# Altium PCB PCB1.PcbDoc
Units mm, origin at the board's own origin, x right, y up, seen from the top; angles counter-clockwise.
Board outline 127 x 101.6 mm, 2 copper layers (Top Layer, Bottom Layer); 37 components, 22 nets, 102 pads, 3 vias.
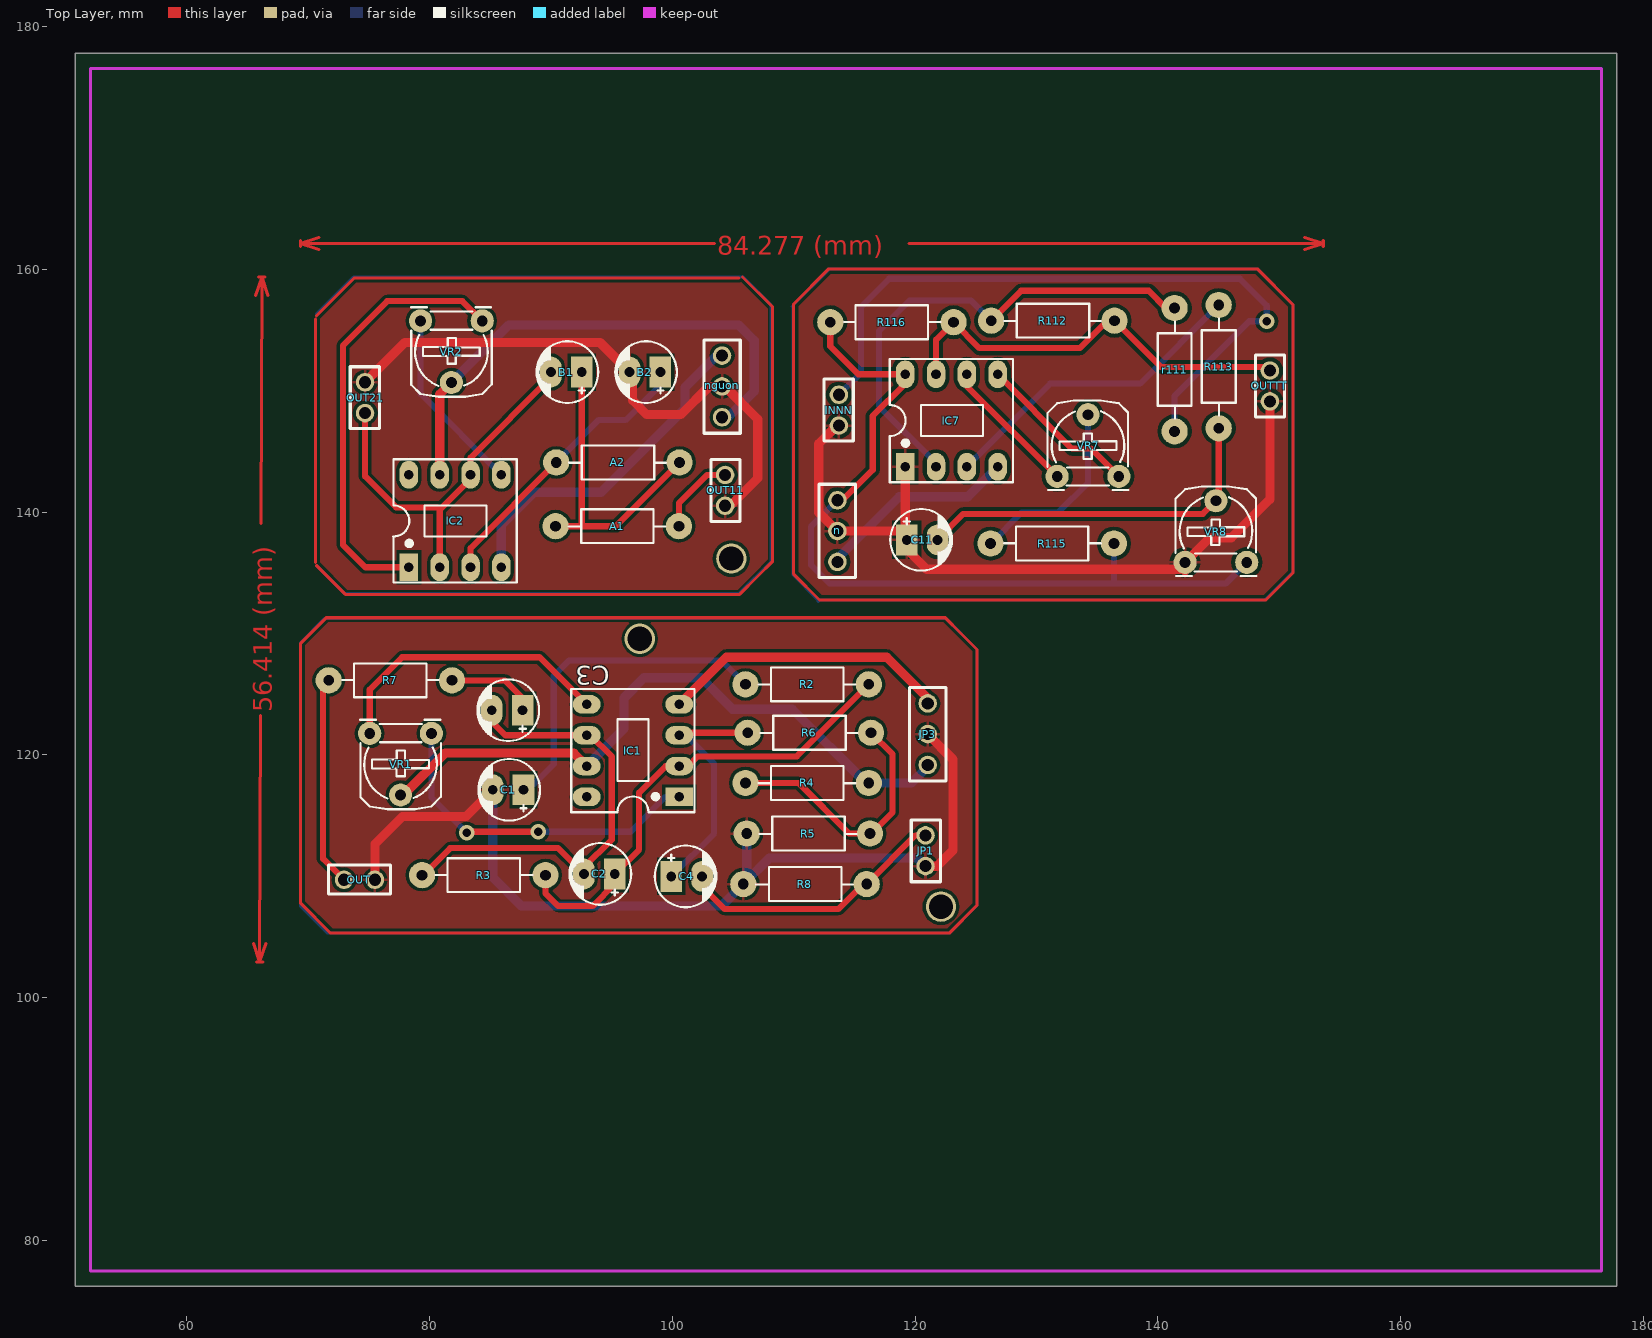
[diagram p0: Top Layer view]
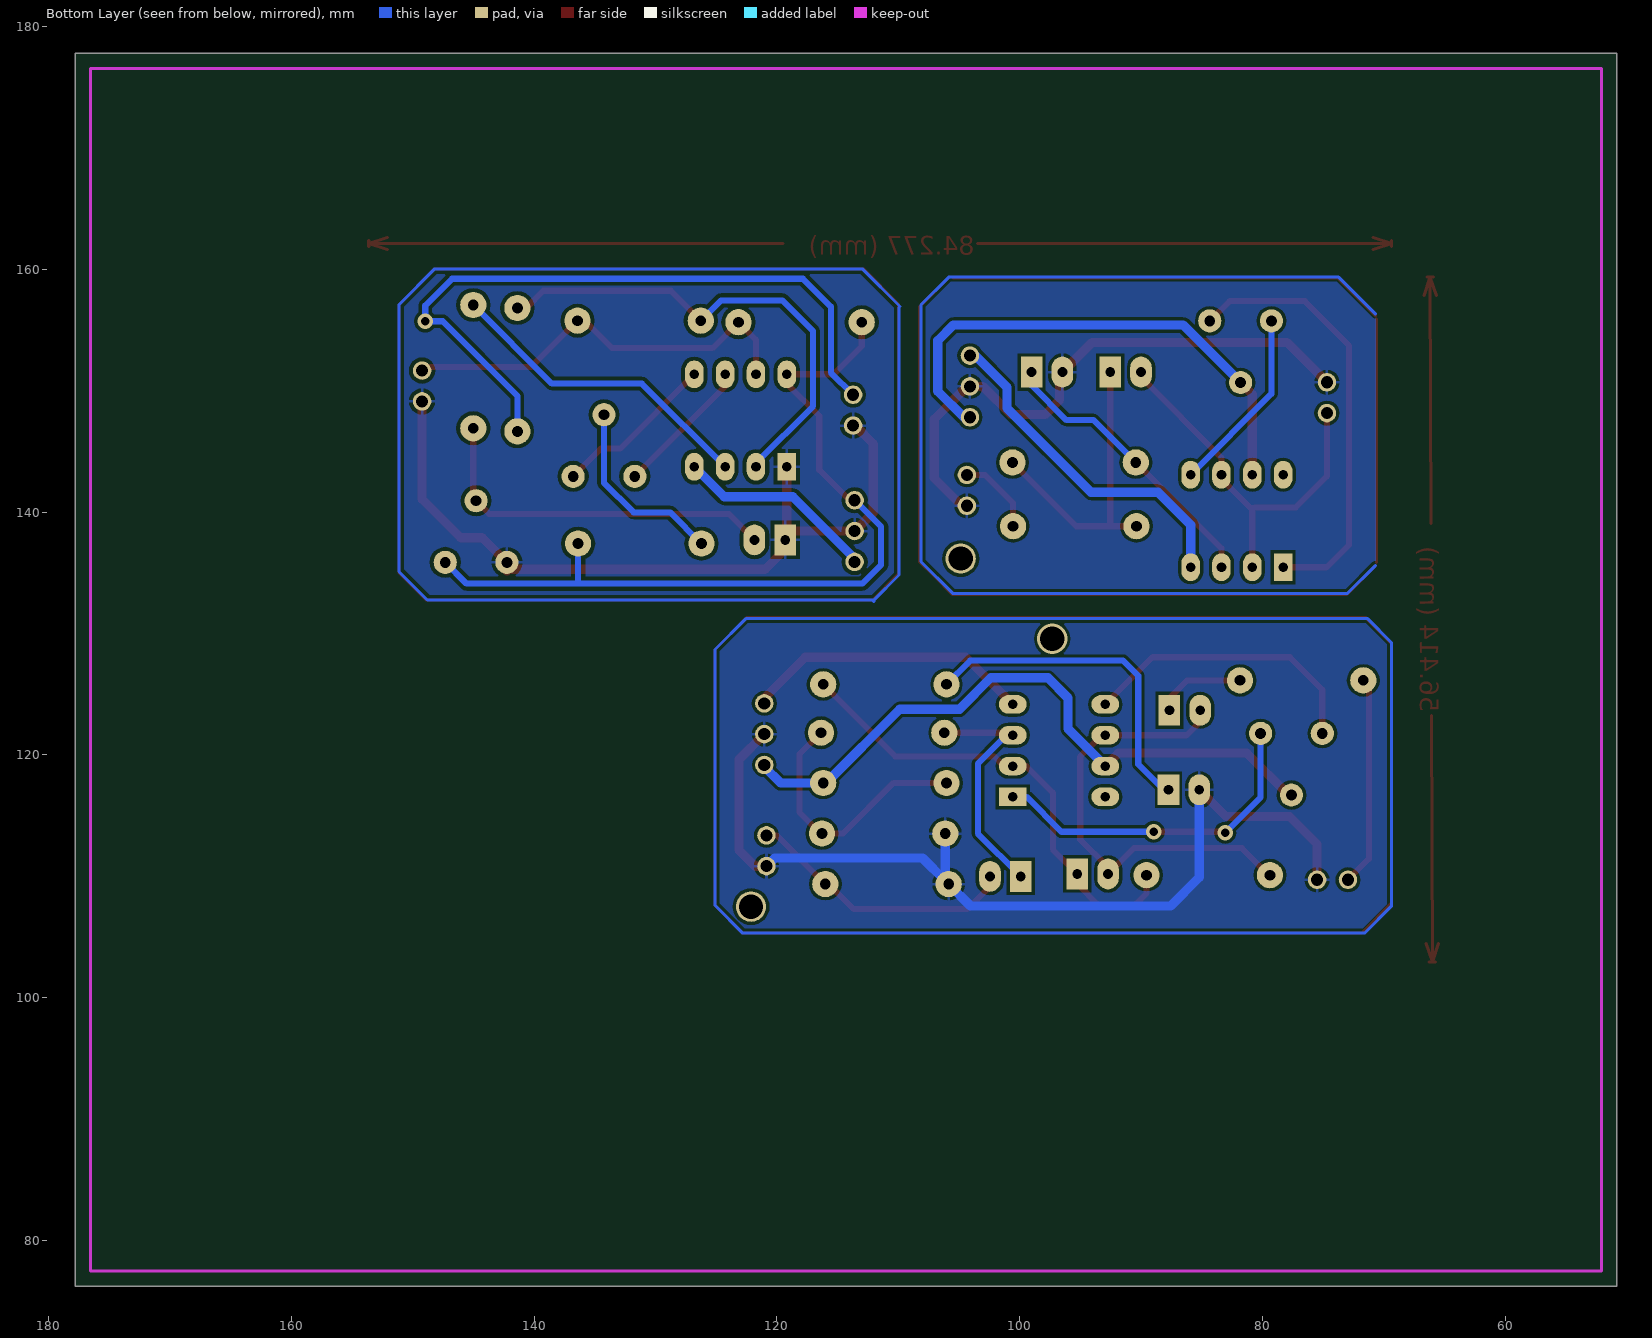
[diagram p1: Bottom Layer view, seen from below]
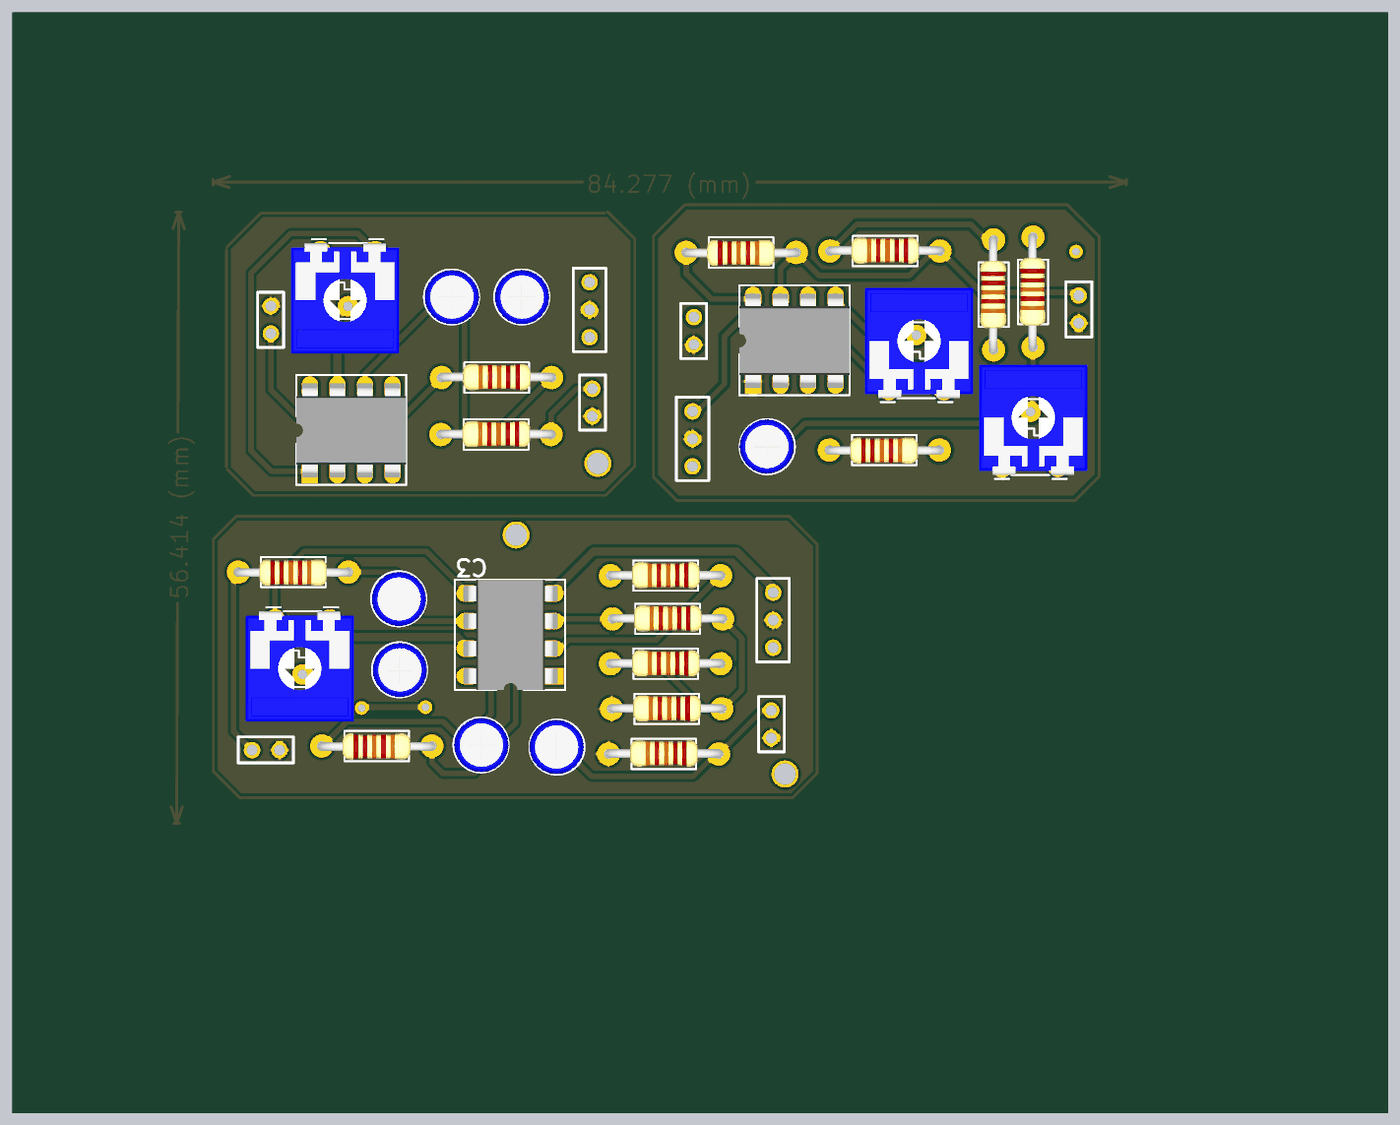
[diagram p2: 3D render of the assembled board from above, using the file's embedded part models]

## Layer stack, top to bottom
Top Layer: signal copper 0.0356
Dielectric: core 0.32, FR-4, Dk 4.8
Bottom Layer: signal copper 0.0356

## Board outline
50.8,76.2 177.8,76.2 177.8,177.8 50.8,177.8

## Design rules (kind name [scope] priority, off if disabled: settings)
Clearance [All] p1: gap=0.254
PolygonConnect [All] p1: connectstyle=Relief reliefconductorwidth=0.254 reliefentries=4 polygonreliefangle="90 Angle" airgapwidth=0.254
RoutingVias [All] p1: holewidth=0.635 width=1.016 viastyle="Through Hole" minholewidth=0.711 minwidth=1.27 maxholewidth=0.711 maxwidth=1.27
SilkToSolderMaskClearance SilkscreenOverComponentPads [IsPad] p1: minsilkscreentomaskgap=0.254 clearancetoexposedcopper=TRUE
SolderMaskExpansion [All] p1: expansion=0.076
Width Width_6 [InNet('VCC1')] p1: maxlimit=0.762 minlimit=0.762 preferedwidth=0.762
Width Width_5 [InNet('VCC')] p2: maxlimit=0.762 minlimit=0.762 preferedwidth=0.762
Width Width_4 [InNet('GND1')] p3: maxlimit=0.762 minlimit=0.762 preferedwidth=0.762
Width Width_3 [InNet('GND')] p4: maxlimit=0.762 minlimit=0.762 preferedwidth=0.762
Width Width_2 [InNet('-VCC1')] p5: maxlimit=0.762 minlimit=0.762 preferedwidth=0.762
Width Width_1 [InNet('-VCC')] p6: maxlimit=0.762 minlimit=0.762 preferedwidth=0.762
Width [All] p7: maxlimit=0.508 minlimit=0.508 preferedwidth=0.508
27 further rules are at their usual default settings.

## Classes and differential pairs
component class MACH: A1 A2 B1 B2 C1 C2 C3 C4 IC1 IC2 JP1 JP3 nguon OUT OUT11 OUT21 R2 R3 R4 R5 R6 R7 R8 VR1 VR2

## Components (designator, comment, footprint, x,y, rotation, side; value= is the part's Value field where it differs from the comment)
A1 "1k" R1/2W 90.373,138.836 r0 top
A2 "1k" R1/2W 90.424,144.094 r0 top
B1 "10uF" CP1/2 92.532,151.536 r180 top
B2 "10uF" CP1/2 99.009,151.536 r180 top
C1 "10uF" CP1/2 87.732,117.119 r180 top
C2 "103" CP1/2 95.25,110.185 r180 top
C3 "100uF/35V" CP1/2 87.655,123.673 r180 top
C4 "100uF/35V" CP1/2 99.898,109.982 r0 top
C11 "103" CP1/2 119.304,137.71 r0 top
IC1 "LF356" DIP8/W0.3 100.559,116.535 r90 top
IC2 "LM741" DIP8/W0.3 78.283,135.458 r0 top
IC7 "LM311" DIP8/W0.3 119.177,143.729 r0 top
INNN "JP2" CON2 113.716,148.428 r90 top
JP1 "JP2" CON2 120.853,112.065 r270 top
JP3 "JP3" CON3 121.031,121.742 r270 top
n "JP3" CON3 113.589,138.395 r90 top (schematic designator nguon)
nguon "JP3" CON3 104.089,150.393 r270 top
OUT "JP2" CON2 74.244,109.703 r0 top
OUT11 "JP2" CON2 104.343,141.757 r270 top
OUT21 "JP2" CON2 74.676,149.454 r90 top
OUTTT "JP2" CON2 149.225,150.359 r270 top
R2 "1K" R1/2W 106.02,125.806 r0 top
R3 "1M" R1/2W 89.535,110.084 r180 top
R4 "1k" R1/2W 106.02,117.678 r0 top
R5 "1k" R1/2W 106.121,113.513 r0 top
R6 "1k" R1/2W 106.197,121.818 r0 top
R7 "1K" R1/2W 81.839,126.136 r180 top
R8 "1K" R1/2W 105.842,109.347 r0 top
r111 "1k" R1/2W 141.376,146.65 r90 top
R112 "1k" R1/2W 126.263,155.769 r0 top
R113 "1k" R1/2W 145.009,146.904 r90 top
R115 "1k" R1/2W 136.373,137.405 r180 top
R116 "1k" R1/2W 123.165,155.642 r180 top
VR1 "5K" VR 80.137,121.768 r180 top
VR2 "5K" VR 84.328,155.753 r180 top
VR7 "5K" VR 131.699,142.942 r0 top
VR8 "5K" VR 142.24,135.855 r0 top

## Footprints (in the part's own frame and the unit in brackets; to place one, negate y for a bottom-side part, rotate by r counter-clockwise, add the part's x,y. Pads: shape width x height; smd on the part's side, far side on the other; paste and mask are expansions set on the pad)
CON2 [mm] "2-Pin Connector; pitch 2.54mm"
  round 1.524 hole 1: 1(-1.3,0) 2(1.24,0)
  silkscreen extent -2.58,-1.18 2.52,1.22
CON3 [mm] "3-Pin Connector; pitch 2.54mm"
  round 1.524 hole 1: 1(-2.5,0) 2(0.04,0) 3(2.58,0)
  silkscreen extent -3.8,-1.5 3.9,1.5
CP1/2 [mil] "Tu hoa  Dia = 5mm < 22uF/16>50V"
  rect 70x100 hole 32: 1(0,0)
  oval 70x100 hole 32: 2(100,0)
  silkscreen extent -53,-100 147,100, body extent -54,-99 144,100, height 296
DIP8/W0.3 [mil] "8 PIN, W 300mil, Pin to pin 100mil"
  rect 60x90 hole 31: 1(0,0)
  oval 60x90 hole 31: 2(100,0) 3(200,0) 4(300,0) 5(300,300) 6(200,300) 7(100,300) 8(0,300)
  silkscreen extent -50,-50 350,350, body extent -50,-40 350,336, height 201
R1/2W [mil] "R 1/2W, 2 pin, 300mil"
  round 85 hole 35: 1(0,0) 2(400,0)
  silkscreen extent 42,-55 356,55, body extent -12,-45 414,49, height 91
VR [mil] "Resistor Variable"
  round 75 hole 35: 1(0,0) 2(100,200) 3(200,0)
  silkscreen extent -31,-44 231,246, body extent -87,-30 307,372, height 165

## Part data
A1 A2 R2 R3 R4 R5 R6 R7 R8 r111 R112 R113 R115 R116: library part R, "Resistor 1/4W"
B1 B2 C1: library part CP1, "Cap P  0,1uF < 22uF , 16 - 50V"
C2 C11: library part CM, "Cap SMD"
C3 C4: library part CP3, "Cap 100uF/35V - 470uF/16V"
IC1: "Wide-Bandwidth Single JFET Input Operational Amplifier"
IC2: "Single OA"
IC7: "Voltage Comparator"
INNN JP1 OUT OUT11 OUT21 OUTTT: library part Con2, "Connector 2"
JP3 n nguon: library part Con3, "Connector 3"
VR1 VR2 VR7 VR8: library part VOL-S, "Var Resistor"

## Free pads (board coordinates)
  round 2.5 hole 2: 1(122.123,107.493) 3(97.307,129.565) 5(104.851,136.169)

## Via types
v1: diameter 1.27, hole 0.711, Top Layer to Bottom Layer, 3 vias

## Nets (pads, with @x,y where several pads share a name; then routed paths per layer and width w, separated by ;. In a path a pad name is that pad's centre, name@x,y a point inside that pad or via, vN(x,y) a via of type N, cw(c..) or ccw(c..) an arc to the next point about the centre after c; other vN are vias at no path point)
-VCC: IC1.4 JP3.1 | length 23.9
  Top Layer w0.762: IC1.4 104.445,128.041 117.653,128.041 121.031,124.663 JP3.1
-VCC1: IC2.4 nguon.1 | length 28.5
  Bottom Layer w0.762: IC2.4 85.903,138.938 88.595,141.63 94.107,141.63 101.041,148.565 101.041,150.292 103.643,152.893 nguon.1
GND: C1.2 JP1.2 JP3.2 OUT.2 R5.1 R8.1 | length 77.4
  Top Layer w0.762: OUT.2 75.484,112.644 77.749,114.91 82.982,114.91 C1.2 ; JP1.2 121.793,110.825 123.114,112.146 123.114,119.619 JP3.2
  Bottom Layer w0.762: C1.2 85.192,109.906 87.554,107.544 104.038,107.544 R8.1 R8.1@106.121,109.626 ; R5.1 R8.1@106.121,109.626 ; 117.437,111.493 117.45,111.506 ; JP1.2 120.172,111.506 117.45,111.506 ; R8.1@106.121,109.626 108.001,111.506 117.45,111.506
GND1: B2.2 nguon.2 OUT11.2 OUT21.2 | length 48
  Top Layer w0.762: OUT21.2 77.957,153.975 94.031,153.975 B2.2 96.717,151.288 96.717,149.206 97.892,148.031 100.686,148.031 103.008,150.353 nguon.2 104.332,150.353 107.036,147.65 107.036,142.799 104.754,140.517 OUT11.2
NetA1_1: A1.1 A2.2 B1.1 | length 25.1
  Top Layer w0.508: A1.1 95.326,138.836 A2.2 ; B1.1 92.532,138.913 92.608,138.836
NetA1_2: A1.2 OUT11.1 | length 6.7
  Top Layer w0.508: A1.2 100.533,140.741 102.849,143.057 OUT11.1
NetA2_1: A2.1 B2.1 IC2.3 | length 23.9
  Top Layer w0.508: IC2.3 83.363,137.033 A2.1
  Bottom Layer w0.508: A2.1 93.904,147.574 96.139,147.574 99.009,150.444 B2.1
NetB1_2: B1.2 IC2.2 IC2.6 OUT21.1 | length 32.4
  Top Layer w0.508: OUT21.1 74.676,142.951 77.241,140.386 80.645,140.386 80.823,140.208 ; IC2.2 80.823,140.208 ; B1.2 89.992,151.105 83.363,144.475 IC2.6 83.363,142.748 80.823,140.208
NetC1_1: C1.1 R2.1 | length 27.8
  Bottom Layer w0.508: C1.1 88.113,117.119 90.221,119.228 90.221,126.517 91.465,127.762 104.064,127.762 R2.1
NetC2_1: C2.1 IC1.2 R2.2 R3.1 | length 40
  Top Layer w0.508: R3.1 89.535,108.585 90.576,107.544 93.421,107.544 95.25,109.372 C2.1 97.257,112.192 97.257,116.891 99.441,119.075 IC1.2 101.295,119.075 102.083,119.863 110.236,119.863 R2.2
  Bottom Layer w0.508: IC1.2@99.898,119.075 IC1.2
NetC2_2: C2.2 C3.2 IC1.6 R3.2 | length 37.8
  Top Layer w0.508: R3.2 79.451,110.084 81.686,112.319 90.576,112.319 C2.2 92.71,110.719 94.996,113.005 94.996,119.863 93.243,121.615 IC1.6 86.233,121.615 85.115,122.733 C3.2
NetC3_1: C3.1 R7.1 | length 7.4
  Top Layer w0.508: R7.1 86.182,126.136 87.655,124.663 C3.1
NetC4_2: C4.2 JP1.1 R8.2 | length 21.7
  Top Layer w0.508: C4.2@102.438,109.144 104.292,107.29 113.665,107.29 115.722,109.347 R8.2 120.02,113.365 JP1.1
NetOUT_1: OUT.1 R7.2 | length 17.3
  Top Layer w0.508: R7.2 71.222,125.679 71.222,111.425 OUT.1
NetR4_1: R4.1 R5.2 R6.2 | length 21.9
  Top Layer w0.508: R4.1 110.388,117.678 114.554,113.513 R5.2 116.383,113.513 118.135,115.265 118.135,120.04 R6.2
PIN1: IC1.1 VR1.1 | length 28.1
  Top Layer w0.508: v1(83.058,113.589) 83.134,113.665 v1(88.951,113.665)
  Bottom Layer w0.508: VR1.1 80.137,116.51 v1(83.058,113.589) ; v1(88.951,113.665) 96.545,113.665 99.416,116.535 IC1.1
PIN5: IC1.5 VR1.3 | length 24.2
  Top Layer w0.508: VR1.3 75.057,125.374 77.724,128.041 89.052,128.041 IC1.5
PIN11: IC2.1 VR2.1 | length 36.3
  Top Layer w0.508: IC2.1 74.701,135.458 72.847,137.312 72.847,153.721 76.505,157.378 82.702,157.378 VR2.1
PIN51: IC2.5 VR2.3 | length 15.4
  Bottom Layer w0.508: VR2.3 79.248,149.733 IC2.5
VCC: IC1.7 JP3.3 R4.2 VR1.2 | length 54.1
  Top Layer w0.762: VR1.2 77.826,116.688 81.28,120.142 91.872,120.142 IC1.7
  Bottom Layer w0.762: IC1.7 96.012,122.149 96.012,124.689 97.663,126.34 102.362,126.34 104.953,123.749 109.88,123.749 115.951,117.678 R4.2 119.685,117.678 121.031,119.024 JP3.3
VCC1: IC2.7 nguon.3 VR2.2 | length 43.1
  Top Layer w0.762: IC2.7 80.823,149.708 VR2.2
  Bottom Layer w0.762: VR2.2 86.538,155.423 105.435,155.423 106.731,154.127 106.731,149.962 104.583,147.813 nguon.3
VIN: C4.1 IC1.3 R6.1 | length 21
  Top Layer w0.508: C4.1 C4.1@99.898,110.668 ; IC1.3 100.762,121.818 R6.1
  Bottom Layer w0.508: C4.1 103.429,113.513 103.429,119.278 101.092,121.615 IC1.3
pads on no net: C11.1 C11.2 IC1.8 IC2.8 IC7.1 IC7.2 IC7.3 IC7.4 IC7.5 IC7.6 IC7.7 IC7.8 INNN.1 INNN.2 n.1 n.2 n.3 OUTTT.1 OUTTT.2 r111.1 r111.2 R112.1 R112.2 R113.1 R113.2 R115.1 R115.2 R116.1 R116.2 VR7.1 VR7.2 VR7.3 VR8.1 VR8.2 VR8.3
copper on no net: | length 1302.6
  Top Layer w0.254: 65.486,104.471 65.989,102.945 ; 65.654,157.836 66.167,159.359 ; 65.735,102.946 66.243,102.945 ; 65.913,159.36 66.421,159.358 ; 66.053,123.255 65.989,102.945 ; 66.103,139.049 66.167,159.359 ; 66.502,104.468 65.989,102.945 ; 66.67,157.833 66.167,159.359 ; 69.342,161.874 69.342,162.382 ; 70.587,135.865 70.587,155.905 ; 70.663,135.611 73.05,133.223 100.508,133.223 105.537,133.223 107.01,134.696 108.255,135.941 108.255,151.714 108.255,156.896 105.778,159.372 ; 70.663,156.159 73.787,159.283 105.486,159.283 ; 70.866,161.62 69.342,162.128 ; 70.866,162.636 69.342,162.128 ; 103.457,162.128 69.342,162.128 ; 119.505,162.128 153.619,162.128 ; 152.095,161.62 153.619,162.128 ; 152.095,162.636 153.619,162.128 ; 153.619,161.874 153.619,162.382 ; 69.367,107.772 71.831,105.308 120.777,105.308 122.809,105.308 125.095,107.594 125.095,109.83 125.095,128.676 123.774,129.997 122.479,131.293 116.764,131.293 71.476,131.293 69.367,129.184 69.367,125.146 69.367,107.772 ; 109.982,134.89 109.982,156.404 109.982,157.141 112.878,160.036 147.676,160.036 148.184,160.036 151.13,157.09 151.13,135.449 151.13,134.992 148.895,132.757 115.037,132.757 112.116,132.757 109.982,134.89
  Top Layer w0.508: 113.005,155.642 113.005,153.661 115.316,151.349 119.177,151.349 119.177,150.587 116.51,147.92 116.51,143.475 114.01,140.975 113.589,140.975 ; 121.717,151.349 121.717,154.194 123.165,155.642 125.298,153.508 133.579,153.508 135.839,155.769 136.423,155.769 140.233,151.959 148.925,151.959 149.225,151.659 ; 121.844,137.71 121.844,137.735 123.952,139.843 143.688,139.843 144.78,140.935 145.009,141.164 145.009,146.904 ; 124.257,151.349 124.257,150.384 131.699,142.942 ; 126.263,155.769 128.727,158.233 139.243,158.233 140.665,156.81 141.376,156.81 ; 126.797,151.349 132.918,145.228 134.493,145.228 136.779,142.942
  Top Layer w0.762: 113.716,147.128 113.559,147.128 112.065,145.634 112.065,139.959 113.589,138.435 118.578,138.435 119.177,137.837 ; 119.177,137.252 119.304,137.125 ; 119.177,143.729 119.177,137.837 ; 149.225,149.119 149.225,141.062 146.05,137.887 144.272,137.887 142.24,135.855 142.24,135.144 142.088,135.297 120.955,135.297 119.304,136.948 119.304,137.125 ; 119.177,137.837 119.304,137.71 119.304,137.125
  Bottom Layer w0.254: 70.663,156.312 73.711,159.36 105.842,159.36 108.128,157.074 108.128,135.915 105.512,133.299 ; 70.688,135.585 72.974,133.299 105.512,133.299 ; 105.359,133.299 105.512,133.299 ; 69.367,107.518 71.577,105.308 122.809,105.308 125.095,107.594 125.095,128.676 122.555,131.216 71.323,131.216 69.367,129.261 69.367,107.518 ; 109.855,156.937 112.954,160.036 148.107,160.036 148.184,160.036 151.13,157.09 151.13,135.093 148.793,132.757 112.116,132.757 112.014,132.655 112.014,132.731 109.931,134.814 109.931,156.861 109.855,156.937
  Bottom Layer w0.508: 113.589,140.975 111.404,138.791 111.404,135.652 112.954,134.103 136.373,134.103 ; 113.716,149.668 115.545,151.497 115.545,156.912 117.856,159.223 146.761,159.223 148.971,157.014 v1(148.971,155.718) 147.523,155.718 141.376,149.571 141.376,146.65 ; 121.717,143.729 121.717,144.034 117.018,148.733 117.018,154.905 119.558,157.445 124.587,157.445 126.263,155.769 ; 124.257,143.729 131.115,150.587 138.532,150.587 145.009,157.064 ; 126.213,137.405 128.778,139.97 131.801,139.97 134.239,142.409 134.239,148.022 ; 136.373,137.405 136.373,134.103 ; 147.32,135.855 145.567,134.103 136.373,134.103
  Bottom Layer w0.762: 113.589,135.895 113.589,136.16 118.694,141.266 124.333,141.266 126.797,143.729

## Polygon pours and split planes (outlines as drawn)
GND1 on Bottom Layer "Top Layer-No Net" (solid, remove dead copper, pour order 18): 105.512,133.299 108.128,135.915 108.128,157.074 105.842,159.36 73.711,159.36 70.663,156.312 70.663,135.611 70.688,135.585 72.974,133.299 105.359,133.299
GND on Bottom Layer "Top Layer-No Net" (solid, remove dead copper, pour order 12): 122.809,105.308 71.577,105.308 69.367,107.518 69.367,129.261 71.323,131.216 122.555,131.216 125.095,128.676 125.095,107.848 125.095,107.594 122.809,105.308
no net on Bottom Layer "Top Layer-No Net" (solid, remove dead copper, pour order 4): 148.184,160.036 151.13,157.09 151.13,135.17 148.793,132.833 148.793,132.757 112.116,132.757 110.058,134.814 109.931,134.814 109.931,156.861 112.954,159.884 112.954,160.036
GND1 on Top Layer "Top Layer-No Net" (solid, remove dead copper, pour order 20): 105.537,133.223 73.05,133.223 70.663,135.611 70.663,156.159 73.711,159.207 73.876,159.372 105.778,159.372 108.255,156.896 108.255,135.941 105.537,133.223
GND on Top Layer "Top Layer-No Net" (solid, remove dead copper, pour order 14): 122.809,105.308 125.095,107.594 125.095,128.676 122.555,131.216 71.552,131.216 71.476,131.293 69.367,129.184 69.367,129.083 69.367,107.772 71.831,105.308 71.907,105.308 122.809,105.308 122.885,105.385
no net on Top Layer "Top Layer-No Net" (solid, remove dead copper, pour order 6): 112.878,160.036 148.184,160.036 151.13,157.09 151.13,156.937 151.13,134.992 148.895,132.757 112.116,132.757 109.982,134.89 109.982,157.141 112.801,159.96

## Keep-outs
Keep-Out Layer:
  lines w0.254: 52.07,77.47 176.53,77.47 176.53,176.53 52.07,176.53 52.07,77.47

## Other copper
Top Layer:
  text "84.277 (mm)" at 103.711,161.214 h1.52
  text "56.414 (mm)" at 66.968,123.506 h1.52 r89.82

## Dimensions
52.07,77.47 to 176.53,77.47 on Mechanical 1
52.07,77.47 to 52.07,176.53 on Mechanical 1